# Altium PCB MB784.PCBDOC (part 2 of 4)
Units mil, origin at the board's own origin, x right, y up, seen from the top; angles counter-clockwise.
Board outline 4505 x 6805 mil, 4 copper layers (TopLayer, GND, S1, BottomLayer); 363 components, 323 nets, 1564 pads, 534 vias.
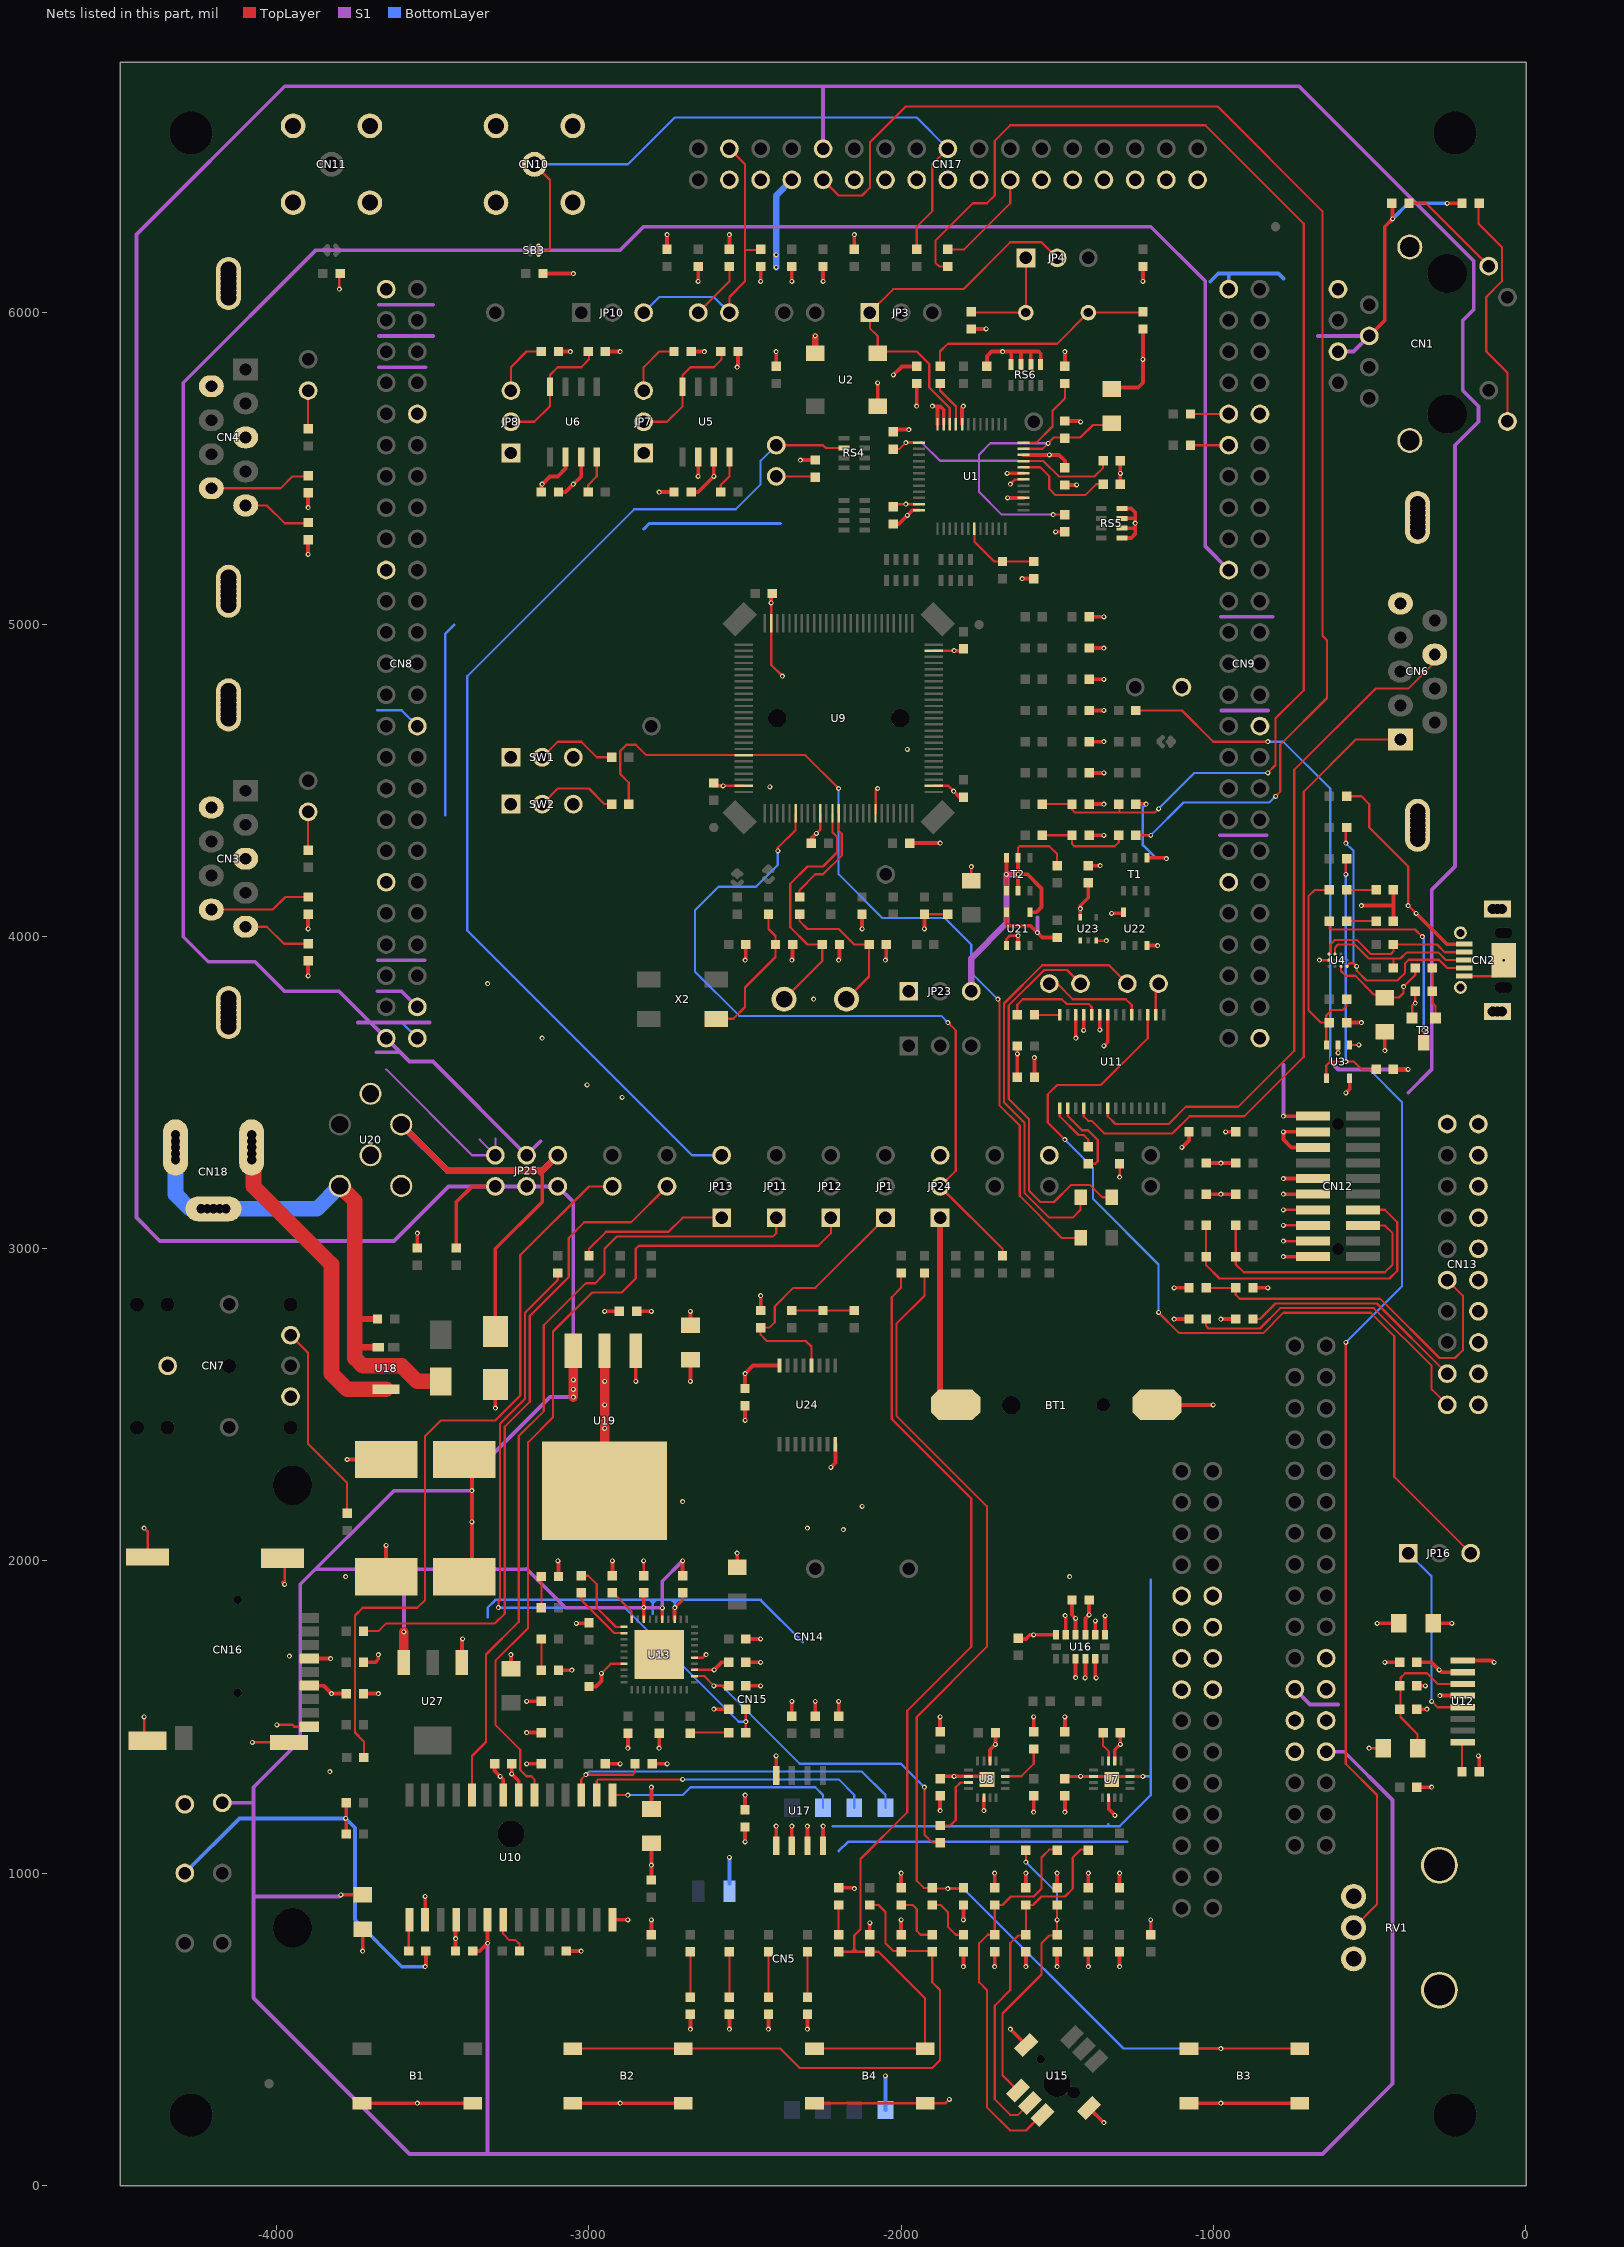
[diagram p4: the nets of this part, all layers, seen from the top]

## Via types
v1: diameter 16, hole 8, TopLayer to BottomLayer, tented both sides, 534 vias

## Nets (pads, with @x,y where several pads share a name; then routed paths per layer and width w, separated by ;. In a path a pad name is that pad's centre, name@x,y a point inside that pad or via, vN(x,y) a via of type N, cw(c..) or ccw(c..) an arc to the next point about the centre after c; other vN are vias at no path point) (continued)
+3V3: B2.1 B2.4 C1.2 C2.2 C6.1 C7.2 C8.2 C13.2 C14.2 C23.1 C26.1 C28.1 C34.2 C35.1 C42.2 C48.1 C75.1 C80.1 C89.1 C90.2 C91.2 C92.2 CN1.4 CN1.5 CN8.48 CN12.1 CN13.1 CN13.2 CN14.24 CN14.25 CN15.9 CN15.10 CN15.13 CN15.14 CN16.4 CN17.28 JP23.1 JP24.3 R1.1 R2.2 R3.1 R6.2 R7.2 R8.2 R13.2 R14.2 R32.1 R33.2 R34.1 R37.2 R39.2 R40.1 R48.2 R50.2 R54.1 R55.1 R56.2 R62.2 R64.1 R65.1 R66.1 R70.1 R71.1 R76.1 R77.1 R89.1 R90.2 R91.2 R92.2 R93.2 R106.1 R107.1 R109.1 R114.2 R115.2 R118.2 R121.2 R122.2 R123.2 R124.2 R133.1 R134.1 R138.2 R146.2 R152.1 R156.2 R160.2 R164.2 RS5.1 RS5.3 RS5.5 RS5.7 RS6.1 RS6.3 RS6.5 RS6.7 RV1.3 SW1.1 SW2.1 T1.4 TP10.1 U1.22 U1.32 U1.48 U2.4 U5.3 U6.3 U7.6 U7.14 U8.6 U8.14 U10.21 U11.22 U11.26 U12.7 U13.33 U16.1 U16.3 U16.6 U17.8 U19.2 U21.5 U22.5 U23.5 U24.16 | length 10982.6
  TopLayer w8: U13.33@-2662.01,1650.79 v1(-2599.21,1650.79)
  TopLayer w12: v1(-3900,4025) R54.1@-3900,4072.5 ; v1(-3900,5375) R55.1@-3900,5422.5 ; CN16.4@-3896.65,1687.01 v1(-3827.99,1687.01) ; v1(-3780,1175) v1@-3777.5,1175 ; R65.1@-3777.5,1125 R64.1@-3777.5,1220 ; C7.2@-3722.5,1575 v1(-3675,1575) ; R138.2@-3722.5,1675 -3685,1675 -3675,1685 v1(-3675,1700) ; v1(-3525,700) -3522.5,702.5 R71.1@-3522.5,750 ; C23.1@-3247.5,1350 v1(-3247.5,1317.5) -3225,1295 U10.21@-3225,1250 ; v1(-3200,1350) R66.1@-3152.5,1350 ; C13.2@-3097.5,5425 -3075,5425 -3025,5475 U6.3@-3025,5537.5 ; R50.2@-3097.5,5875 v1(-3060,5875) ; B2.1@-3052.17,262.5 B2.4@-2697.83,262.5 ; v1(-2950,2800) C80.1@-2902.5,2800 ; R70.1@-2800,977.5 C26.1@-2800,1095 ; C75.1@-2675,2755 v1(-2675,2800) ; C14.2@-2672.5,5425 -2650,5425 v1(-2600,5475) U5.3@-2600,5537.5 ; R48.2@-2672.5,5875 v1(-2630,5875) ; v1(-2599.21,1650.79) -2575,1675 C42.2@-2552.5,1675 ; C91.2@-2500,1202.5 v1(-2500,1250) ; C48.1@-2500,2552.5 v1(-2500,2600) -2474.02,2625.98 U24.16@-2389.57,2625.98 ; R152.1@-2450,2802.5 v1(-2450,2850) ; U17.8@-2400,1312.5 v1(-2400,1375) ; R32.1@-2400,5827.5 v1(-2400,5875) ; R107.1@-2350,1502.5 v1(-2350,1550) ; v1(-2322.5,5527.5) R2.2@-2275,5527.5 ; R134.1@-2275,1502.5 v1(-2275,1550) ; R133.1@-2200,1502.5 v1(-2200,1550) ; R115.2@-2100,802.5 v1(-2100,840) ; C1.2@-2025,5322.5 -2007.5,5322.5 -1963.27,5366.73 U1.48@-1942.32,5366.73 ; R109.1@-2000,952.5 v1(-2000,1000) ; v1(-1950,5700) C8.2@-1950,5772.5 ; v1(-1875,1200) C90.2@-1875,1247.5 ; U1.32@-1804.53,5642.32 -1804.53,5695.47 v1(-1800,5700) ; v1(-1800,850) R114.2@-1800,897.5 ; v1(-1735,1200) -1734.84,1200.16 U8.14@-1734.84,1241.26 ; R8.2@-1725,5827.5 -1725,5860 -1710,5875 -1560,5875 -1552.76,5867.76 RS6.1@-1552.76,5833.5 ; U8.6@-1715.16,1358.74 -1715.16,1394.84 v1(-1697.5,1412.5) R164.2@-1697.5,1450 ; v1(-1700,700) R90.2@-1700,747.5 ; U21.5@-1662.4,4078.15 -1662.4,4042.4 -1655,4035 -1585,4035 -1547.5,3997.5 R156.2@-1500,3997.5 ; RS6.7@-1647.24,5833.5 -1647.24,5872.76 ; R106.1@-1622.5,1750 -1600,1750 -1586.61,1763.39 U16.6@-1503.74,1763.39 ; RS6.5@-1615.75,5833.5 -1615.75,5874.25 ; v1(-1612.5,5147.5) R1.1@-1575,5147.5 ; U1.22@-1607.68,5543.9 -1493.9,5543.9 -1475,5525 C6.1@-1475,5502.5 ; v1(-1600,700) R89.1@-1600,747.5 ; RS6.3@-1584.25,5833.5 -1584.25,5874.25 ; v1(-1575,1195) R160.2@-1575,1247.5 ; R56.2@-1575,1452.5 v1(-1575,1500) ; C28.1@-1572.5,3550 v1(-1572.5,3612.5) ; v1(-1500,700) R91.2@-1500,747.5 ; v1(-1475,1195) C89.1@-1475,1247.5 ; U11.26@-1440.16,3749.61 -1440.16,3675.16 v1(-1440,3675) ; U23.5@-1425.59,4062.4 -1425.59,4099.41 -1400,4125 C2.2@-1400,4175 ; U16.3@-1409.25,1763.39 -1409.25,1815.75 v1(-1397.5,1827.5) C92.2@-1397.5,1875 ; v1(-1400,700) R92.2@-1400,747.5 ; v1(-1350,3650) -1337.8,3662.2 U11.22@-1337.8,3749.61 ; U16.1@-1346.26,1763.39 v1(-1346.26,1823.74) ; U7.14@-1334.84,1241.26 -1334.84,1204.84 v1(-1315,1185) ; v1(-1325,4075) U22.5@-1290.55,4075 ; U7.6@-1315.16,1358.74 -1315.16,1394.84 v1(-1297.5,1412.5) R37.2@-1297.5,1450 ; v1(-1300,700) R93.2@-1300,747.5 ; R7.2@-1297.5,5450 R6.2@-1297.5,5525 ; RS5.1@-1291.5,5277.76 -1262.24,5277.76 -1250,5290 -1250,5360 -1262.24,5372.24 RS5.7@-1291.5,5372.24 ; RS5.3@-1291.5,5309.25 -1250.75,5309.25 ; RS5.5@-1291.5,5340.75 -1250.75,5340.75 ; v1(-1225,6100) R146.2@-1225,6147.5 ; T1.4@-1212.6,4253.15 -1153.15,4253.15 v1(-1150,4250) ; R62.2@-1022.5,3175 R122.2@-927.5,3175 ; R124.2@-1022.5,3275 R123.2@-927.5,3275 ; v1(-960,3375) R121.2@-927.5,3375 ; R118.2@-872.5,2875 v1(-825,2875) ; v1(-775,3425) CN12.1@-680,3425 ; R34.1@-572.5,3725 v1(-525,3725) ; v1(-525,4100) -422.5,4100 ; CN1.5@-500,5925 -450,5975 -450,6275 v1(-425,6300) R13.2@-425,6347.5 ; R40.1@-422.5,3575 v1(-375,3575) ; R39.2@-422.5,4050 R33.2@-422.5,4150 ; R3.1@-347.5,1275 v1(-300,1275) ; R77.1@-347.5,1525 v1(-315,1525) ; C34.2@-347.5,1675 -300,1675 -268.5,1643.5 U12.7@-200,1643.5 ; C35.1@-295,1800 v1(-235,1800) ; v1(-250,6350) R14.2@-202.5,6350 ; v1(-150,1375) -147.5,1372.5 R76.1@-147.5,1325
  TopLayer w20: U2.4@-2275,5870 v1(-2275,5925)
  TopLayer w30: U19.2@-2950,2225 U19.2@-2950,2673.82
  S1 w12: -3677.43,3825 -3600,3825 CN8.48@-3550,3775 ; -3676.1,3925 -3527.09,3925 ; -3672.91,5825 -3523.9,5825 ; -3672.91,5925 -3500,5925 ; -3672.91,6025 -3500,6025 ; v1(-1562.97,4012.97) -1562.97,4062.03 ; -978.39,4325 -829.38,4325 ; -976.1,5025 -810,5025 ; -972.91,4725 -823.9,4725 ; v1(-775,3425) -775,3590 ; -665,5925 CN1.5@-500,5925 -550,5875 CN1.4@-600,5875 ; -620,3595 -600,3575 v1(-375,3575)
  BottomLayer w12: TP10.1@-4295,1000 -4120,1175 v1(-3780,1175) -3750,1145 -3750,850 -3600,700 v1(-3525,700) ; v1(-425,6300) -375,6350 v1(-250,6350)
  BottomLayer w20: v1(-2400,6145) -2400,6375 CN17.28@-2350,6425
  other v1: -2900,262.5 -2800,1025 -275.77,1650.77 -1575,1763.39 -2950,2425 -2950,2500 -2950,2575 -975,3175 -975,3275 -1425.59,4090 -1250,5325 -1980,5350 -3050,5450 -1297.5,5485 -1525,5543.9 -1675,5875 -2400,6185
+5V: C21.1 C25.1 C37.1 C38.1 C79.1 C79_1.1 CN14.23 CN14.28 CN17.25 JP25.1 JP25.3 JP25.5 R148.2 TP11.1 U3.5 U10.6 U13.5 U13.8 U19.3 U27.3 | length 24920.5
  TopLayer w12: v1(-3795,930) C25.1@-3725,930 ; R148.2@-3425,3002.5 -3425,3150 -3375,3200 JP25.1@-3300,3200 ; C79.1@-3375,1950 C79_1.1@-3375,2325 ; C21.1@-3372.5,750 -3350,750 v1(-3325,775) U10.6@-3325,850 ; U13.8@-2824.21,1812.99 C38.1@-2824.21,1896.71 ; U13.5@-2765.16,1812.99 v1(-2765.16,1849.84) ; C37.1@-2700,1952.5 v1(-2700,2000) ; v1(-575,3500) -562.6,3512.4 U3.5@-562.6,3546.85
  TopLayer w30: U27.3@-3593,1675 v1(-3593,1773) ; v1(-3050,2525) U19.3@-3050,2673.82
  S1 w12: TP11.1@-4175,1225 -4075,1225 ; -4075,925 v1@-3800,925 ; -3877,1973 -3202,1973 -3200,1975 -3074.84,1849.84 v1(-2765.16,1849.84) -2765.16,1934.84 v1(-2700,2000) ; v1(-3593,1773) -3593,1973 ; -3375,1975 v1(-3375,2125) ; -3325,100 v1(-3325,775) ; CN17.25@-2250,6525 -2250,6725 ; CN14.23@-738.06,1588.72 -689.35,1540 -600,1540 ; CN14.28@-638.06,1388.72 -580,1388.72 -425,1233.72 -425,325 -650,100 -3575,100 -4075,600 -4075,1275 -3925,1425 -3925,1925 -3625,2225 v1(-3375,2225) -3375,2275 -3125,2525 v1(-3050,2525) -3050,3150 JP25.5@-3100,3200 -3450,3200 -3625,3025 -4375,3025 -4450,3100 -4450,6250 -3975,6725 -725,6725 -165,6165 -165,6010 -200,5975 -200,5750 -150,5700 -150,5650 -225,5575 -225,4225 -300,4150 -300,3575 -375,3500
  other v1: -2824.21,1850.79 -3050,2550 -3050,2580
CTS: CN6.8 U11.7 | length 2247.8
  TopLayer w7: U11.7@-1337.8,3450.39 -1337.8,3425 -1312.8,3400 -1142.43,3400 -1087.43,3455 -920,3455 -740,3635 -740,4535 -480,4795 -375,4795 -290,4880 CN6.8@-290,4904
D5V: CN8.49 CN9.19 JP25.4 | length 8045.9
  S1 w12: -3740,3725 -3510,3725 ; -3681.62,3630 -3605,3630 ; -3155,3345 JP25.4@-3200,3300 -3500,3600 -3575,3600 -3800,3825 -3975,3825 -4070,3920 -4220,3920 -4300,4000 -4300,5775 -3875,6200 -2900,6200 -2825,6275 -1200,6275 -1025,6100 -1025,5250 CN9.19@-950,5175
DCD: CN6.1 U11.4 | length 2083.7
  TopLayer w7: U11.4@-1414.57,3450.39 -1414.57,3424.57 -1400,3410 -1388.79,3410 -1348.79,3370 -1130,3370 -1075,3425 -900,3425 -710,3615 -710,4465 -543,4632 CN6.1@-400,4632
E5V: C74.1 JP25.6 U20.3 | length 1765.9
  TopLayer w12: C74.1@-3300,2735 -3300,3000 -3150,3150 -3150,3250 ; -3165,3250 -3150,3235
  TopLayer w20: U20.3@-3601.57,3398.43 -3453.15,3250 -3150,3250 JP25.6@-3100,3300
  S1 w20: U20.3@-3601.57,3398.43 -3453.15,3250 -3150,3250 JP25.6@-3100,3300
GND: B1.1 B1.4 B3.1 B3.4 B4.1 B4.4 BT1.2 C1.1 C2.1 C3.2 C4.1 C5.1 C6.2 C7.1 C8.1 C9.1 C10.2 C11.2 C12.2 C13.1 C14.1 C15.1 C16.2 C17.2 C18.2 C19.2 C21.2 C22.2 C23.2 C24.1 C25.2 C26.2 C27.2 C28.2 C29.2 C32.2 C33.2 C34.1 C35.2 C36.2 C37.2 C38.2 C39.1 C40.1 C41.1 C42.1 C45.2 C47.2 C48.2 C49.1 C50.1 C51.2 C52.1 C53.1 C54.1 C55.1 C56.1 C60.1 C61.1 C62.1 C63.1 C64.1 C65.1 C66.1 C67.1 C68.1 C69.1 C70.1 C71.1 C72.1 C73.1 C74.2 C75.2 C76.2 C78.2 C79.2 C79_1.2 C80.2 C81.2 C82.2 C83.2 C84.2 C85.2 C86.2 C87.2 C89.2 C90.1 C91.1 C92.1 C93.1 C94.1 CN1.8 CN1.13 CN1.14 CN2.0 CN2.5 CN3.0 CN3.3 CN3.6 CN4.0 CN4.3 CN4.6 CN5.5 CN5.17 CN6.0 CN6.5 CN7.1 CN7.4 CN8.1 CN8.10 CN8.19 CN8.30 CN8.39 CN8.50 CN9.1 CN9.10 CN9.30 CN9.39 CN9.50 CN10.1 CN10.2 CN10.3 CN10.4 CN11.1 CN11.2 CN11.3 CN11.4 CN12.3 CN12.5 CN12.9 CN12.11 CN12.13 CN12.15 CN12.17 CN12.19 CN13.4 CN13.6 CN13.8 CN13.10 CN13.12 CN13.14 CN13.16 CN13.18 CN13.20 CN14.22 CN14.26 CN14.27 CN15.11 CN15.12 CN15.15 CN15.16 CN16.6 CN16.9 CN16.G1 CN16.G2 CN16.G3 CN16.G4 CN17.2 CN17.4 CN17.6 CN17.8 CN17.10 CN17.12 CN17.16 CN17.18 CN17.20 CN17.22 CN17.24 CN17.30 CN17.32 JP7.1 JP8.1 JP17.2 LD1.2 LD2.2 LD3.2 LD4.2 LD7.2 R5.1 R31.1 R46.2 R47.2 R49.1 R51.1 R57.2 R58.2 R67.2 R72.1 R73.1 R74.2 R81.2 R108.1 R110.1 R111.1 R112.2 R113.2 R117.2 R125.1 R126.1 R127.2 R128.2 R145.1 R147.1 RV1.0 RV1.1 SW1.3 SW2.3 T3.1 TP7.1 TP12.1 U1.15 U1.19 U1.35 U1.36 U1.47 U2.2 U3.2 U4.D2 U5.2 U6.2 U7.0 U7.3 U7.10 U8.0 U8.10 U9.10 U9.19 U9.27 U9.49 U9.74 U9.99 U10.2 U10.4 U10.14 U10.22 U11.23 U11.25 U12.5 U12.8 U13.0 U13.3 U13.17 U13.35 U15.G U16.2 U16.4 U16.5 U16.10 U16.11 U16.12 U17.1 U17.2 U17.3 U17.4 U19.1 U20.4 U20.5 U20.6 U21.1 U21.2 U22.3 U23.3 U24.8 U27.1 | length 18206.8
  TopLayer w8: CN16.G2@-4425,1430 v1(-4425,1500) ; v1(-4425,2105) -4414.37,2094.37 CN16.G3@-4414.37,2012.8 ; v1(-4078.31,1418.31) CN16.G4@-3961.61,1418.31 ; v1(-4000,1475) -3950,1475 -3943.5,1468.5 CN16.9@-3896.65,1468.5 ; v1(-3975,1925) CN16.G1@-3975,2015 ; v1(-3800,6075) R113.2@-3800,6122.5 ; v1(-2960,1640) -2929.53,1670.47 U13.17@-2887.99,1670.47 ; C38.2@-2825,1952.5 v1(-2825,2000) ; U13.35@-2662.01,1690.16 -2634.84,1690.16 v1(-2625,1700) ; v1(-2570,4483.46) U9.99@-2504.13,4483.46 ; v1(-2416.54,5070) -2416.54,4871.54 v1(-2380,4835) ; B4.1@-2277.17,262.5 -1857.5,262.5 v1(-1845,275) ; v1(-2271.12,4331.38) -2259.06,4343.44 U9.10@-2259.06,4395.87 ; U9.19@-2081.89,4395.87 -2081.89,4468.11 v1(-2075,4475) ; C1.1@-2023.58,5386.42 U1.47@-1942.32,5386.42 ; C86.2@-1925,4072.5 C27.2@-1850,4072.5 ; U9.27@-1895.87,4483.46 -1848.46,4483.46 v1(-1831.32,4466.32) ; U9.49@-1895.87,4916.54 v1(-1830,4916.54) ; C76.2@-1775,4180 v1(-1775,4225) ; U21.1@-1662.4,3971.85 -1662.4,3992.6 -1651.3,4003.7 v1(-1625,4003.7) ; U23.3@-1374.41,3987.6 v1(-1342.4,3987.6) ; v1(-1300,3230) C33.2@-1300,3272.5 ; v1(-775,3025) CN12.17@-680,3025 ; v1(-775,3075) CN12.15@-680,3075 ; v1(-775,3125) CN12.13@-680,3125 ; v1(-659.5,3925) U4.D2@-629.53,3925 ; v1(-500,1400) C36.2@-455,1400 ; T3.1@-362.5,3740 -362.5,3777.5 v1(-352.5,3787.5) R5.1@-352.5,3825 ; CN2.5@-195,3873.82 CN2.0@-91.18,3873.82
  TopLayer w10: v1@-2725.79,1849.21 -2700,1875 C37.2@-2700,1897.5 ; C89.2@-1479.84,1309.84 v1(-1225.16,1309.84)
  TopLayer w12: -3981.3,1931.3 v1(-3975,1925) ; v1(-3900,3875) R49.1@-3900,3922.5 ; v1(-3900,5225) R51.1@-3900,5272.5 ; CN16.6@-3896.65,1600.39 -3850.39,1600.39 v1(-3825,1575) C7.1@-3777.5,1575 ; v1(-3775,2325) C79_1.2@-3625,2325 ; B1.1@-3727.17,262.5 B1.4@-3372.83,262.5 ; v1(-3725,750) C25.2@-3725,820 ; C79.2@-3650,1925 v1(-3650,2050) ; LD7.2@-3550,3002.5 v1(-3550,3050) ; U10.2@-3525,850 v1(-3525,925) ; C21.2@-3427.5,750 U10.4@-3427.5,847.5 ; U27.1@-3407,1675 -3407,1748 v1(-3405,1750) ; C23.2@-3302.5,1350 -3302.5,1327.5 -3275,1300 U10.22@-3275,1250 ; v1(-3300,2490) C74.2@-3300,2565 ; C51.2@-3250,1655 v1(-3250,1700) ; v1(-3200,1450) C50.1@-3152.5,1450 ; v1(-3200,1550) C49.1@-3152.5,1550 ; C13.1@-3152.5,5425 -3152.5,5447.5 -3125,5475 -3100,5475 -3075,5500 U6.2@-3075,5537.5 ; R112.2@-3147.5,6125 v1(-3050,6125) ; v1(-3100,2000) -3097.5,1997.5 R72.1@-3097.5,1950 ; R73.1@-3097.5,1650 v1(-3055,1650) ; C22.2@-3072.5,750 v1(-3025,750) ; v1(-3040,1800) C39.1@-3002.5,1800 ; C41.1@-3000,1597.5 -2977.5,1597.5 -2960,1615 v1(-2960,1640) ; R67.2@-2947.5,1350 v1(-2900,1350) ; R47.2@-2947.5,5875 v1(-2900,5875) ; U10.14@-2925,850 v1(-2875,850) ; C45.2@-2925,1952.5 v1(-2925,2000) ; v1(-2875,1400) C93.1@-2875,1447.5 ; v1(-2850,2575) U19.1@-2850,2673.82 ; C80.2@-2847.5,2800 v1(-2800,2800) ; C15.1@-2800,802.5 v1(-2800,850) ; C26.2@-2800,1205 v1(-2800,1275) ; C24.1@-2797.5,1350 v1(-2750,1350) ; v1(-2775,1400) C94.1@-2775,1447.5 ; v1(-2775,5425) C14.1@-2727.5,5425 ; C67.1@-2750,6202.5 v1(-2750,6250) ; U13.3@-2725.79,1812.99 v1@-2725.79,1849.21 ; v1(-2675,500) LD4.2@-2675,547.5 ; v1(-2675,2575) C75.2@-2675,2645 ; v1(-2650,5475) U5.2@-2650,5537.5 ; v1(-2650,6100) C70.1@-2650,6147.5 ; C85.2@-2603.46,4483.46 v1(-2570,4483.46) ; v1(-2600,1525) R81.2@-2552.5,1525 ; v1(-2550,500) LD3.2@-2550,547.5 ; C73.1@-2550,6202.5 v1(-2550,6250) ; C47.2@-2525,1980 v1(-2525,2025) ; v1(-2525,5825) -2522.5,5827.5 R46.2@-2522.5,5875 ; v1(-2500,1100) C91.1@-2500,1147.5 ; v1(-2500,2450) C48.2@-2500,2497.5 ; v1(-2500,3925) -2497.5,3927.5 C16.2@-2497.5,3975 ; R74.2@-2497.5,1600 v1(-2450,1600) ; C42.1@-2497.5,1675 v1(-2450,1675) ; C40.1@-2497.5,1750 v1(-2450,1750) ; v1(-2450,6100) C68.1@-2450,6155 ; v1(-2425,500) LD2.2@-2425,547.5 ; v1(-2416.54,5070) C84.2@-2416.54,5094.04 ; U17.1@-2400,1087.5 v1(-2400,1150) ; U17.2@-2350,1087.5 v1(-2350,1150) ; v1(-2350,3925) -2347.5,3927.5 C17.2@-2347.5,3975 ; v1(-2350,6100) C69.1@-2350,6147.5 ; v1(-2300,500) LD1.2@-2300,547.5 ; U17.3@-2300,1087.5 v1(-2300,1150) ; C81.2@-2287.5,4300 -2287.5,4315 v1(-2271.12,4331.38) ; v1@-2269.87,4330.13 v1@-2269.87,4332.63 ; U17.4@-2250,1087.5 v1(-2250,1150) ; v1(-2250,6100) C72.1@-2250,6147.5 ; v1(-2225,2300) -2210.43,2314.57 U24.8@-2210.43,2374.02 ; R111.1@-2200,952.5 -2152.5,952.5 v1(-2150,950) ; v1(-2200,3925) -2197.5,3927.5 C18.2@-2197.5,3975 ; C71.1@-2150,6202.5 v1(-2150,6250) ; v1(-2125,4025) R147.1@-2125,4072.5 ; U2.2@-2075,5700 v1(-2075,5775) ; v1(-2050,3925) -2047.5,3927.5 C19.2@-2047.5,3975 ; C5.1@-2030,5625 v1(-1975,5625) ; v1(-2025,5800) -1997.5,5827.5 C8.1@-1950,5827.5 ; R117.2@-2000,802.5 v1(-2000,850) ; C87.2@-1972.5,4300 v1(-1875,4300) ; v1(-1925,4025) C86.2@-1925,4072.5 ; v1(-1900,5700) -1875,5700 -1863.58,5688.58 U1.35@-1863.58,5642.32 ; U1.36@-1883.27,5642.32 -1883.27,5700 ; R58.2@-1875,1452.5 v1(-1875,1500) ; C90.1@-1874.84,1309.84 -1734.84,1309.84 U8.0@-1734.68,1310 ; v1(-1831.32,4466.32) -1812.5,4447.5 C83.2@-1800,4447.5 ; v1(-1830,4916.54) C82.2@-1805.96,4916.54 ; v1(-1800,700) R110.1@-1800,747.5 ; C10.2@-1775,5947.5 v1(-1727.5,5947.5) ; C53.1@-1700,952.5 v1(-1700,1000) ; v1(-1659.84,5484.84) U1.19@-1607.68,5484.84 ; v1(-1658.9,5406.1) U1.15@-1607.68,5406.1 ; v1(-1650,500) U15.G@-1599,448.99 ; C28.2@-1627.5,3550 C32.2@-1627.5,3650 ; U21.2@-1625,3971.85 v1(-1625,4003.7) ; C52.1@-1600,952.5 v1(-1600,1000) ; v1(-1505,5297.5) C3.2@-1475,5297.5 ; C54.1@-1500,952.5 v1(-1500,1000) ; R57.2@-1475,1452.5 v1(-1475,1500) ; C6.2@-1475,5447.5 v1(-1437.5,5447.5) ; C4.1@-1475,5652.5 -1427.5,5652.5 v1(-1425,5650) ; R31.1@-1475,5827.5 v1(-1475,5875) ; v1(-1474.49,1825) -1472.24,1822.76 U16.5@-1472.24,1763.39 ; C92.1@-1452.5,1875 -1452.5,1827.5 v1(-1440.75,1815.75) U16.4@-1440.75,1763.39 ; v1(-1440.75,1625.75) U16.10@-1440.75,1686.61 ; v1(-1415,3700) -1414.57,3700.43 U11.25@-1414.57,3749.61 ; v1(-1410,1625) -1409.25,1625.75 U16.11@-1409.25,1686.61 ; C55.1@-1400,952.5 v1(-1400,1000) ; C2.1@-1400,4227.5 v1(-1362.5,4227.5) ; C63.1@-1397.5,4325 v1(-1350,4325) ; R145.1@-1397.5,4425 v1(-1350,4425) ; C78.2@-1397.5,4525 v1(-1350,4525) ; C64.1@-1397.5,4625 v1(-1350,4625) ; C60.1@-1397.5,4725 v1(-1350,4725) ; C65.1@-1397.5,4825 v1(-1350,4825) ; C66.1@-1397.5,4925 v1(-1350,4925) ; C61.1@-1397.5,5025 v1(-1350,5025) ; U15.G@-1397.47,247.47 v1(-1350,200) ; U16.12@-1377.76,1686.61 -1377.76,1627.76 v1(-1375,1625) ; U16.2@-1377.76,1763.39 v1(-1377.76,1807.76) ; v1(-1363.39,3701.61) U11.23@-1363.39,3749.61 ; C11.2@-1325,5760 -1240,5760 -1225,5775 C9.1@-1225,5947.5 ; C56.1@-1300,952.5 v1(-1300,1000) ; C62.1@-1247.5,4425 v1(-1215,4425) ; U22.3@-1212.6,3971.85 v1(-1178.15,3971.85) ; R108.1@-1200,802.5 v1(-1200,850) ; BT1.2@-1161.42,2500 v1(-1000,2500) ; v1(-1125,2775) R128.2@-1077.5,2775 ; v1(-1125,2875) R126.1@-1077.5,2875 ; v1(-1100,3325) -1077.5,3347.5 R125.1@-1077.5,3375 ; B3.1@-1077.17,262.5 B3.4@-722.83,262.5 ; v1(-975,2775) R127.2@-927.5,2775 ; v1(-775,2975) CN12.19@-680,2975 ; v1(-775,3175) CN12.11@-680,3175 ; v1(-775,3225) CN12.9@-680,3225 ; CN12.5@-680,3325 -750,3325 -775,3350 v1(-775,3375) CN12.3@-680,3375 ; v1(-600,3628.15) U3.2@-600,3653.15 ; v1(-475,1800) C35.2@-405,1800 ; v1(-450,1675) C34.1@-402.5,1675 ; v1(-450,3635) C12.2@-450,3695 ; C29.2@-347.5,1600 v1(-320,1600) ; v1(-273.7,1568.7) U12.5@-200,1568.7 ; U12.8@-200,1680.91 -105.91,1680.91 v1(-100,1675)
  BottomLayer w8: -3678.39,3725 -3600,3725 CN8.50@-3550,3675 ; -3678.39,4725 -3600,4725 CN8.30@-3550,4675 ; -3461,4390 -3461,4970.16 -3431.16,5000 ; -3325,1820 -3325,1850 -3300,1875 -2450,1875 -2315,1740 ; v1@-3010,3525 v1(-3006,3525) ; -2805,1875 -2795,1865 -2785,1875 ; -2795,1830.62 -2795,1875 ; -2735,1875 -2725,1865 -2715,1875 ; v1(-2725,1850) -2725,1875 ; -2218.33,1150 -1341.48,1150 -1335.48,1156 ; -2200,1070 -2170,1100 -1275,1100 ; -1360,1150 -1300,1150 -1200,1250 -1200,1345 ; v1(-1225.16,1309.84) -1200.16,1309.84 -1200,1310 -1200,1940 ; v1(-1215,4425) -1225,4415 -1225,4293.84 -1185.26,4254.1
  BottomLayer w10: -2825,5306.16 -2807.66,5323.5 -2386.5,5323.5
  BottomLayer w12: CN5.17@-2550,966.54 v1(-2550,1050) ; CN5.5@-2050,240.75 v1(-2050,350) ; -1009.34,6099.65 -983.99,6125 -791.01,6125 -774.8,6108.79 ; CN9.1@-950,6075 -950,6125
  other v1: -3550,262.5 -975,262.5 -3427.5,790 -3285,1310 -1830,1309.84 -1425,1309.84 -3830,1325 -3960,1695 -2775,1700 -3780,1950 -1460,1950 -2185,2100 -2300,2105 -2125,2175 -2700,2190 -2894,3485 -1627.5,3625 -3150,3675 -2280,3800 -3325,3850 -69.02,3925 -2420,4480 -1980,4600 -1985,5386.42 -3150,5450 -1225,5850
NC: U23.1
NetB3_2: B3.2 B3.3 C57.2 R104.1 R114.1 | length 3796.5
  TopLayer w7: R104.1@-1925,2922.5 -1925,2850 -2015,2760 -2015,2465 -1725,2175 -1725,1725 -1950,1500 -1950,975 -1927.5,952.5 C57.2@-1900,952.5 ; C57.2@-1897.5,950 R114.1@-1800,950 ; B3.2@-1077.17,437.5 B3.3@-722.83,437.5
  BottomLayer w7: v1(-1850,950) -1800,950 -1287.5,437.5 v1(-975,437.5)
NetB4_2: B4.2 B4.3 C58.2 R105.1 R115.1 | length 3330.5
  TopLayer w7: B4.2@-2277.17,437.5 B4.3@-1922.83,437.5 -1922.83,597.83 -2072.5,747.5 C58.2@-2200,747.5 ; -2160,747.5 -2150,757.5 -2140,747.5 ; -2150,747.5 -2150,800 -2130,820 -2130,1045 -1980,1195 -1980,1520 -1775,1725 -1775,2200 -2030,2455 -2030,2845 -2000,2875 R105.1@-2000,2922.5
NetBT1_1: BT1.1 JP24.1 | length 590
  TopLayer w20: BT1.1@-1875,2510 JP24.1@-1875,3100
NetC3_1: C3.1 C4.2 C5.2 C11.1 U1.18 U1.23 U1.37 | length 1499.4
  TopLayer w7: C5.2@-2025,5562.5 -2005.77,5562.5 v1(-1985,5583.27) U1.37@-1942.32,5583.27 ; v1(-1650,5450) -1634.84,5465.16 U1.18@-1607.68,5465.16 ; U1.23@-1607.68,5563.58 -1546.42,5563.58 -1510,5600 -1425,5600 -1385,5640 C11.1@-1325,5640 ; v1(-1512.5,5352.5) C3.1@-1475,5352.5
  S1 w7: v1(-1985,5583.27) -1933.27,5583.27 -1875,5525 -1625,5525 ; v1(-1528.91,5581.09) -1713.91,5581.09 -1750,5545 -1750,5425 -1677.5,5352.5 v1(-1512.5,5352.5)
NetC9_2: C9.2 R30.2 X1.2 | length 746.8
  TopLayer w7: R30.2@-1875,5827.5 -1875,5875 -1850,5900 -1500,5900 X1.2@-1400,6000 C9.2@-1227.5,6000
NetC10_1: C10.1 JP4.1 X1.1 | length 347.5
  TopLayer w7: C10.1@-1772.5,6000 X1.1@-1600,6000 JP4.1@-1600,6175
NetC17_1: C17.1 R59.1 X2.4 | length 454.7
  TopLayer w7: X2.4@-2591.73,3737.01 -2537.99,3737.01 -2500,3775 -2500,3837.5 -2402.5,3935 -2402.5,4002.5 -2425,4025 R59.1@-2425,4072.5
NetC18_1: C18.1 U9.12 X3.2 | length 814.4
  TopLayer w7: X3.2@-2375,3800 -2252.5,3922.5 C18.1@-2252.5,3975 -2300,3975 -2355,4030 -2355,4170 -2300,4225 -2250,4225 -2205,4270 -2205,4320 -2219.69,4334.69 U9.12@-2219.69,4395.87
NetC19_1: C19.1 R63.2 X3.1 | length 481.1
  TopLayer w7: R63.2@-2325,4072.5 -2325,4050 -2300,4025 -2200,4025 -2150,3975 C19.1@-2102.5,3975 -2102.5,3872.5 X3.1@-2175,3800
NetC20_1: C20.1 U10.7 | length 133.5
  TopLayer w7: U10.7@-3275,850 -3275,805 -3255,785 -3235,785 -3222.5,772.5 C20.1@-3222.5,750
NetC24_2: C24.2 CN5.1 U10.17 | length 1295.3
  TopLayer w7: U10.17@-3025,1250 -3025,1300 v1(-3010,1315) -2860,1315 -2852.5,1322.5 C24.2@-2852.5,1350
  BottomLayer w7: v1(-3010,1315) -3000,1325 -2125,1325 -2050,1250 CN5.1@-2050,1209.25
NetC30_1: C30.1 U11.24 | length 314
  TopLayer w7: C30.1@-1627.5,3750 -1627.5,3782.5 -1610,3800 -1485,3800 -1470,3785 -1398.98,3785 -1388.98,3775 U11.24@-1388.98,3749.61
NetC30_2: C30.2 U11.28 | length 80.8
  TopLayer w7: C30.2@-1572.11,3749.61 U11.28@-1491.34,3749.61
NetC31_1: C31.1 U11.1 | length 170.3
  TopLayer w7: U11.1@-1491.34,3450.39 -1491.34,3425 -1431.34,3365 -1415,3365 -1400,3350 C31.1@-1400,3327.5
NetC31_2: C31.2 U11.2 | length 254.2
  TopLayer w7: U11.2@-1465.75,3450.39 -1465.75,3425.75 -1420,3380 -1401.21,3380 -1370,3348.79 -1370,3280 -1377.5,3272.5 C31.2@-1400,3272.5
NetC45_1: C45.1 U13.10 | length 108.9
  TopLayer w7: C45.1@-2922.5,1897.5 -2863.58,1838.58 U13.10@-2863.58,1812.99
NetC46_1: C46.1 U13.12 | length 203.5
  TopLayer w7: C46.1@-3025,1897.5 -3025,1875 -2918.9,1768.9 U13.12@-2887.99,1768.9
NetC46_2: C46.2 U13.11 | length 248.8
  TopLayer w7: C46.2@-3025,1952.5 -3002.5,1952.5 -2975,1925 -2975,1850 -2913.58,1788.58 U13.11@-2887.99,1788.58
NetC57_1: C57.1 R110.2 | length 167.2
  TopLayer w7: C57.1@-1900,897.5 -1872.5,897.5 -1850,875 -1850,827.5 -1825,802.5 R110.2@-1800,802.5
NetC58_1: C58.1 R111.2 | length 95
  TopLayer w7: C58.1@-2200,802.5 R111.2@-2200,897.5
NetC59_1: C59.1 R109.2 | length 180.4
  TopLayer w7: R109.2@-2000,897.5 -1962.5,897.5 -1950,885 -1950,815 -1937.5,802.5 C59.1@-1900,802.5
NetC59_2: B2.2 B2.3 C59.2 R116.1 R117.1 | length 1883.8
  TopLayer w7: B2.2@-3047.5,437.5 -2387.5,437.5 -2325,375 -1900,375 -1875,400 -1875,625 -1900,650 C59.2@-1900,747.5 ; R116.1@-2100,897.5 -2072.5,897.5 -2050,875 -2050,775 -2025,750 C59.2@-1902.5,750
NetC62_2: C62.2 R84.1 R140.2 R145.2 | length 4309.2
  TopLayer w7: R140.2@-1850,6147.5 -1877.5,6147.5 -1890,6160 -1890,6230 -1770,6350 -1725,6350 -1700,6375 -1700,6550 -1650,6600 -1025,6600 -710,6285 -710,4790 -800,4700 -800,4550 v1(-825,4525) ; R84.1@-1547.5,4425 R145.2@-1452.5,4425 -1452.5,4407.5 -1443.5,4398.5 -1186.5,4398.5 v1(-1175,4410) ; -1300,4398.5 C62.2@-1300,4422.5
  BottomLayer w7: v1(-1175,4410) -1060,4525 v1(-825,4525)
NetC63_2: C63.2 R85.1 R142.2 | length 303.3
  TopLayer w7: R85.1@-1547.5,4325 C63.2@-1452.5,4325 -1452.5,4297.5 -1445,4290 -1315,4290 -1302.5,4302.5 R142.2@-1302.5,4325
NetC73_2: C73.2 JP21.2 | length 188.9
  TopLayer w7: JP21.2@-2650,6000 -2550,6100 C73.2@-2550,6147.5
NetC88_2: C88.2 R153.2 R158.2 | length 200
  TopLayer w7: R153.2@-2350,2802.5 C88.2@-2150,2802.5
NetC95_2: C95.2 R81.1 R83.1 | length 2169.9
  TopLayer w7: v1(-3290,1850) -3290,1870 -3285,1875 -3285,2440 -3205,2520 -3205,2795 -3100,2900 R83.1@-3100,2922.5 ; C95.2@-2497.5,1450 R81.1@-2497.5,1525
  BottomLayer w7: v1(-3290,1850) -2885,1850 -2520,1485 v1(-2497.5,1485)
NetCN5_2: CN5.2 U10.16 | length 933.5
  TopLayer w7: U10.16@-2975,1250 -2975,1295 -2970,1300 v1(-2700,1300)
  BottomLayer w7: v1(-2700,1300) -2200,1300 -2150,1250 CN5.2@-2150,1209.25
NetCN5_3: CN5.3 U10.15 | length 736.5
  TopLayer w7: U10.15@-2925,1250 v1(-2875,1250)
  BottomLayer w7: v1(-2875,1250) -2700,1250 -2675,1275 -2275,1275 -2250,1250 CN5.3@-2250,1209.25
NetCN10_5: CN10.5 CN17.17 R143.2 SB3.1 | length 2120.6
  TopLayer w7: CN10.5@-3175,6475 -3125,6425 -3125,6205 -3131,6199 -3150,6199 SB3.1@-3157,6192 ; R143.2@-1950,6202.5 -1950,6275 -1900,6325 -1900,6475 CN17.17@-1850,6525
  BottomLayer w7: CN10.5@-3175,6475 -2875,6475 -2725,6625 -1950,6625 CN17.17@-1850,6525
NetCN12_14: CN12.14 R119.1 R129.1 | length 1049.5
  TopLayer w7: R119.1@-1022.5,3075 -1022.5,2947.5 -980,2905 -435,2905 -410,2930 -410,3085 -450,3125 CN12.14@-520,3125
NetCN12_16: CN12.16 R120.1 R130.1 | length 853.6
  TopLayer w7: R120.1@-927.5,3075 -927.5,2950 -902.5,2925 -450,2925 -425,2950 -425,3050 -450,3075 CN12.16@-520,3075
NetCN13_11: CN13.11 R118.1 R126.2 | length 1184.9
  TopLayer w7: R126.2@-1022.5,2875 R118.1@-927.5,2875 -927.5,2852.5 -915,2840 -465,2840 -275,2650 -225,2650 -200,2675 -200,2850 CN13.11@-250,2900
NetCN13_17: CN13.17 R127.1 | length 736.4
  TopLayer w7: R127.1@-872.5,2775 -850,2775 -800,2825 -475,2825 CN13.17@-250,2600
NetCN13_19: CN13.19 R128.1 | length 997.4
  TopLayer w7: R128.1@-1022.5,2775 -1022.5,2752.5 -1015,2745 -850,2745 -785,2810 -485,2810 -300,2625 -300,2550 CN13.19@-250,2500
NetCN17_14: CN17.14 R140.1 | length 336.1
  TopLayer w7: R140.1@-1850,6202.5 -1797.5,6202.5 -1650,6350 CN17.14@-1650,6425
NetCN17_26: CN17.26 R142.1 | length 4411.3
  TopLayer w7: CN17.26@-2250,6425 -2200,6375 -2125,6375 -2100,6400 -2100,6545 -1985,6660 -985,6660 -650,6325 -650,4965 -635,4950 -635,4765 -785,4615 -785,4465 v1(-800,4450) ; R142.1@-1247.5,4325 v1(-1200,4325)
  BottomLayer w7: v1(-1200,4325) -1095,4430 -820,4430 v1(-800,4450)
NetCN18_1: CN18.1 U18.1 | length 1058.4
  TopLayer w50: CN18.1@-4075,3359.09 -4075,3200 -3825,2950 -3825,2600 -3775,2550 U18.1@-3650,2550
NetCN18_3: C77.2 CN18.2 CN18.3 U18.2 U20.2 Z1.1 | length 1786.5
  TopLayer w20: -3750,2775 C77.2@-3677.5,2775 ; -3745,2685 U18.2@-3675,2685
  TopLayer w50: U20.2@-3798.43,3201.57 -3750,3153.15 -3750,2650 -3725,2625 -3600,2625 -3550.2,2575.2 Z1.1@-3475,2575.2
  BottomLayer w50: CN18.3@-4325,3365 -4325,3175 -4278.15,3128.15 -3871.85,3128.15 U20.2@-3798.43,3201.57
NetD1_2: D1.2 JP18.1 | length 1366.6
  TopLayer w7: D1.2@-1425,3165 -1425,3125 -1450,3100 -1525,3100 -1605,3180 -1605,3405 -1670,3470 -1670,3786.36 -1547.86,3908.5 -1333.5,3908.5 JP18.1@-1275,3850
NetD2_2: D2.2 JP19.1 | length 1235.1
  TopLayer w7: JP19.1@-1425,3850 -1468.5,3893.5 -1541.5,3893.5 -1655,3780 -1655,3480 -1590,3415 -1590,3186.21 -1553.79,3150 -1510,3150 -1455,3205 -1395,3205 -1355,3165 D2.2@-1325,3165
NetJP1_1: JP1.1 R152.2 U24.12 | length 837.5
  TopLayer w7: U24.12@-2287.2,2625.98 -2287.2,2687.2 -2305,2705 -2430,2705 -2450,2725 R152.2@-2450,2747.5 -2422.5,2747.5 -2405,2765 -2405,2815 -2345,2875 -2275,2875 JP1.1@-2050,3100
NetJP2_1: JP2.1 JP13.3 RS4.6 | length 3489
  TopLayer w7: JP2.1@-2400,5575 -2250,5575 -2240.75,5565.75 RS4.6@-2183.5,5565.75
  BottomLayer w7: JP13.3@-2575,3300 -2670,3300 -3390,4020 -3390,4835 -2855,5370 -2530,5370 -2450,5450 -2450,5525 JP2.1@-2400,5575
NetJP2_2: JP2.2 R2.1 | length 122.5
  TopLayer w7: JP2.2@-2400,5475 R2.1@-2277.5,5475
NetJP3_1: JP3.1 JP4.2 U1.34 U2.3 | length 1255.9
  TopLayer w7: U2.3@-2075,5870 -2075,5925 -2100,5950 JP3.1@-2100,6000 -2025,6075 -1800,6075 -1650,6225 -1550,6225 JP4.2@-1500,6175 ; U2.3@-2075,5875 -1950,5875 -1910,5835 -1910,5760 -1843.9,5693.9 U1.34@-1843.9,5642.32
NetJP7_3: JP7.3 R48.1 | length 193.2
  TopLayer w7: JP7.3@-2825,5750 -2825,5825 -2775,5875 R48.1@-2727.5,5875
NetJP8_3: JP8.3 R50.1 | length 193.2
  TopLayer w7: JP8.3@-3250,5750 -3250,5825 -3200,5875 R50.1@-3152.5,5875
NetJP10_3: C68.2 CN17.31 JP10.3 JP21.1 | length 930.3
  TopLayer w7: JP21.1@-2550,6000 -2550,6050 -2500,6100 -2500,6475 CN17.31@-2550,6525 ; -2500,6200 C68.2@-2452.5,6200
  BottomLayer w7: JP10.3@-2825,6000 -2775,6050 -2600,6050 JP21.1@-2550,6000
NetJP11_1: JP11.1 U10.24 | length 2564.3
  TopLayer w7: U10.24@-3375,1250 -3375,1375 -3330,1420 -3330,1700 -3225,1805 -3225,2400 -3145,2480 -3145,2755 -3010,2890 -2980,2890 -2950,2920 -2950,3000 -2910,3040 -2410,3040 -2400,3050 JP11.1@-2400,3100
NetJP12_1: JP12.1 U10.20 | length 2748.3
  TopLayer w7: U10.20@-3175,1250 -3175,1300 -3185,1310 -3200,1310 -3220,1330 -3220,1395 -3300,1475 -3300,1680 -3195,1785 -3195,2380 -3115,2460 -3115,2735 -2990,2860 -2895,2860 -2850,2905 -2850,3000 -2840,3010 -2265,3010 -2225,3050 JP12.1@-2225,3100
NetJP13_1: JP13.1 R68.2 | length 498.9
  TopLayer w7: R68.2@-3000,2977.5 -3000,3000 -2945,3055 -2745,3055 -2700,3100 JP13.1@-2565,3100
NetJP15_2: JP15.2 R136.2 | length 2147.8
  TopLayer w7: R136.2@-3722.5,1775 -3675,1775 -3650,1800 -3301.21,1800 -3270,1831.21 -3270,2430 -3190,2510 -3190,2785 -3065,2910 -3065,3035 -3015,3085 -2865,3085 JP15.2@-2750,3200
NetJP16_1: JP16.1 U12.4 | length 613.8
  TopLayer w7: v1(-300,1550) -281.3,1531.3 U12.4@-200,1531.3
  BottomLayer w7: JP16.1@-375,2025 -300,1950 v1(-300,1550)
NetJP16_3: JP16.3 U11.17 | length 2957.1
  TopLayer w7: v1(-1475,3350) -1530,3405 -1530,3495 -1500,3525 -1359.84,3525 -1209.84,3675 U11.17@-1209.84,3749.61 ; v1(-1175,2796.21) -1108.79,2730 -840,2730 -775,2795 -495,2795 -420,2720 -420,2270 JP16.3@-175,2025
  BottomLayer w7: v1(-1475,3350) -1385,3260 -1385,3160 -1175,2950 v1(-1175,2796.21) ; JP16.3@-175,2025 JP16.3@-175,2030
NetJP18_2: JP18.2 U11.16 | length 104.2
  TopLayer w7: U11.16@-1184.25,3749.61 -1184.25,3840.75 JP18.2@-1175,3850
NetJP19_2: JP19.2 U11.19 | length 324
  TopLayer w7: JP19.2@-1525,3850 -1500,3850 -1450,3800 -1280,3800 -1261.02,3781.02 U11.19@-1261.02,3749.61
NetJP23_3: JP23.3 R157.1 T2.1 T2.2 T2.5 T2.6 U21.4 | length 1114
  TopLayer w7: T2.5@-1625,4253.15 -1625,4285 -1620,4290 -1525,4290 -1500,4265 R157.1@-1500,4227.5
  TopLayer w12: T2.1@-1662.4,4146.85 T2.6@-1662.4,4253.15 ; v1(-1662.4,4200) -1595,4200 -1550,4155 -1550,4095 -1566.85,4078.15 U21.4@-1587.6,4078.15 ; T2.2@-1625,4146.85 T2.5@-1625,4253.15
  S1 w20: JP23.3@-1775,3825 -1775,3930 -1662.4,4042.6 v1(-1662.4,4200) v1(-1625,4200)
NetJP24_2: JP24.2 R150.2 U9.6 | length 2450.7
  TopLayer w7: v1(-2395,4275) -2395,4285 -2337.8,4342.2 U9.6@-2337.8,4395.87 ; v1(-1850,3725) -1825,3700 -1825,3250 JP24.2@-1875,3200 -1675,3000 R150.2@-1675,2977.5
  BottomLayer w7: v1(-2395,4275) -2395,4230 -2465,4160 -2585,4160 -2660,4085 -2660,3887.76 -2518.74,3746.5 -1871.5,3746.5 v1(-1850,3725)
NetJP26_1: JP26.1 R137.1 | length 2432.6
  TopLayer w7: R137.1@-3721.34,1370 -3721.34,1421.34 -3750,1450 -3750,1825 -3725,1850 -3550,1850 -3525,1875 -3525,2400 -3475,2450 -3300,2450 -3220,2530 -3220,2980 -3000,3200 JP26.1@-2925,3200
NetLD1_1: LD1.1 R94.1 | length 145
  TopLayer w7: LD1.1@-2300,602.5 R94.1@-2300,747.5
NetLD2_1: LD2.1 R95.1 | length 145
  TopLayer w7: LD2.1@-2425,602.5 R95.1@-2425,747.5
NetLD3_1: LD3.1 R96.1 | length 145
  TopLayer w7: LD3.1@-2550,602.5 R96.1@-2550,747.5
NetLD4_1: LD4.1 R97.1 | length 145
  TopLayer w7: LD4.1@-2675,602.5 R97.1@-2675,747.5
NetLD5_1: LD5.1 R33.1 | length 95
  TopLayer w7: LD5.1@-572.5,4150 R33.1@-477.5,4150
NetLD6_2: LD6.2 T3.3 | length 673
  TopLayer w7: LD6.2@-627.5,4050 -627.5,4027.5 -623.11,4023.11 -353.11,4023.11 v1(-330,4000) ; T3.3@-325,3660.5 v1(-325,3700)
  BottomLayer w7: v1(-330,4000) -325,3995 v1(-325,3700)
NetR1_2: R1.2 R41.2 U1.7 | length 257.9
  TopLayer w7: U1.7@-1765.16,5307.68 -1765.16,5266.37 -1701.29,5202.5 R1.2@-1575,5202.5
NetR4_1: R4.1 R5.2 T3.2 | length 164.1
  TopLayer w7: R4.1@-297.5,3900 -297.5,3787.5 -287.5,3777.5 T3.2@-287.5,3740
NetR6_1: R6.1 U1.21 | length 309.5
  TopLayer w7: U1.21@-1607.68,5524.21 -1544.21,5524.21 -1495,5475 -1380,5475 -1352.5,5502.5 R6.1@-1352.5,5525
NetR7_1: R7.1 U1.20 | length 330.2
  TopLayer w7: U1.20@-1607.68,5504.53 -1554.53,5504.53 -1525,5475 -1525,5435 -1505,5415 -1410,5415 -1375,5450 R7.1@-1352.5,5450
NetR13_1: CN1.12 R13.1 | length 338.8
  TopLayer w7: R13.1@-372.5,6350 -318,6350 CN1.12@-117,6149
NetR14_1: CN1.9 R14.1 | length 776.4
  TopLayer w7: R14.1@-150,6347.5 -150,6285 -75,6210 -75,6100 -125,6050 -125,5875 -57,5807 CN1.9@-57,5651
NetR30_1: R30.1 U1.33 | length 151.2
  TopLayer w7: R30.1@-1875,5772.5 -1875,5750 -1824.21,5699.21 U1.33@-1824.21,5642.32
NetR31_2: R31.2 U1.24 | length 268.2
  TopLayer w7: U1.24@-1607.68,5583.27 -1566.73,5583.27 -1515,5635 -1515,5685 -1475,5725 R31.2@-1475,5772.5
NetR34_2: LD5.2 R34.2 R35.2 U3.3 | length 719.1
  TopLayer w7: U3.3@-637.4,3653.15 -637.4,3747.6 -620,3765 -585,3765 -572.5,3777.5 R35.2@-572.5,3800 ; R34.2@-627.5,3725 -655,3725 -695,3765 -695,4130 -675,4150 LD5.2@-627.5,4150
NetR36_1: R36.1 R40.2 U3.4 | length 867.2
  TopLayer w7: U3.4@-637.4,3546.85 -637.4,3587.6 -625,3600 -550,3600 -525,3575 R40.2@-477.5,3575 ; v1(-575,4200) -575,4247.5 R36.1@-572.5,4250
  BottomLayer w7: v1(-575,3600) v1(-575,4200)
NetR37_1: R37.1 U7.7 | length 98.6
  TopLayer w7: R37.1@-1352.5,1450 -1352.5,1407.5 -1334.84,1389.84 U7.7@-1334.84,1358.74
NetR38_1: CN2.4 R38.1 U4.A3 | length 922.7
  TopLayer w7: v1(-575,4300) R38.1@-575,4347.5 ; U4.A3@-570.47,3907.63 -563.1,3915 -550,3915 v1(-540,3905) -540,3891.21 -508.79,3860 -410,3860 -385,3885 -385,3915 -373.5,3926.5 -276.5,3926.5 -249.41,3899.41 CN2.4@-195,3899.41
  BottomLayer w7: v1(-575,4300) -550,4275 -550,3915 v1(-540,3905)
NetR39_1: LD6.1 R39.1 | length 95
  TopLayer w7: LD6.1@-572.5,4050 R39.1@-477.5,4050
NetR42_1: CN2.2 R42.1 U4.D1 | length 522.6
  TopLayer w7: U4.D1@-629.53,3944.68 -624.84,3949.37 -624.84,3974.84 -609.68,3990 -540,3990 -495,3945 -430,3945 -422.5,3952.5 R42.1@-422.5,3975 -282.57,3975 -258.16,3950.59 CN2.2@-195,3950.59
NetR43_1: CN2.3 R43.1 U4.C1 | length 506.7
  TopLayer w7: U4.C1@-609.84,3944.68 -609.84,3965.16 -600,3975 -546.21,3975 -501.21,3930 -400,3930 -380,3950 -278.79,3950 -253.79,3925 CN2.3@-195,3925 ; R43.1@-422.5,3900 -422.5,3930
NetR44_1: R44.1 U5.4 | length 123.9
  TopLayer w7: R44.1@-2577.5,5425 -2577.5,5447.5 -2550,5475 U5.4@-2550,5537.5
NetR45_1: R45.1 U6.4 | length 123.9
  TopLayer w7: R45.1@-3002.5,5425 -3002.5,5447.5 -2975,5475 U6.4@-2975,5537.5
NetR46_1: JP7.2 R46.1 U5.8 | length 413.9
  TopLayer w7: JP7.2@-2825,5650 -2750,5650 -2700,5700 -2700,5800 -2675,5825 -2600,5825 -2575,5850 R46.1@-2575,5872.5
NetR47_1: JP8.2 R47.1 U6.8 | length 413.9
  TopLayer w7: JP8.2@-3250,5650 -3175,5650 -3125,5700 -3125,5800 -3100,5825 -3025,5825 -3000,5850 R47.1@-3000,5872.5
NetR49_2: CN3.5 R49.2 | length 222.6
  TopLayer w7: CN3.5@-4100,4032 -4032,4032 -3977.5,3977.5 R49.2@-3900,3977.5
NetR51_2: CN4.5 R51.2 | length 221.1
  TopLayer w7: CN4.5@-4100,5382 -4032,5382 -3975,5325 R51.2@-3902.5,5325
NetR52_2: JP5.1 R52.2 | length 122.5
  TopLayer w7: R52.2@-3900,4277.5 JP5.1@-3900,4400
NetR53_2: JP6.1 R53.2 | length 122.5
  TopLayer w7: R53.2@-3900,5627.5 JP6.1@-3900,5750
NetR54_2: CN3.9 R54.2 | length 326.8
  TopLayer w7: CN3.9@-4210,4087 -4013,4087 -3972.5,4127.5 R54.2@-3900,4127.5
NetR55_2: CN4.9 R55.2 | length 323.2
  TopLayer w7: CN4.9@-4210,5437 -3988,5437 -3950,5475 R55.2@-3902.5,5475
NetR56_1: R56.1 U8.3 | length 155.4
  TopLayer w7: U8.3@-1666.26,1309.84 -1615.16,1309.84 -1575,1350 R56.1@-1575,1397.5
NetR60_2: R60.2 SW1.2 | length 263.9
  TopLayer w7: SW1.2@-3150,4575 -3100,4625 -3025,4625 -2975,4575 R60.2@-2927.5,4575
NetR61_1: D1.1 R61.1 U9.94 | length 2861
  TopLayer w7: R61.1@-2872.5,4425 -2872.5,4493.71 -2900,4521.21 -2900,4595 -2880,4615 -2850,4615 -2816.89,4581.89 -2306.89,4581.89 v1(-2200,4475) ; v1(-1690,3800) -1685,3795 -1685,3460 -1620,3395 -1620,3170 -1485,3035 D1.1@-1425,3035
  BottomLayer w7: v1(-2200,4475) -2200,4200 -2060,4060 -1860,4060 -1775,3975 -1775,3885 v1(-1690,3800)
NetR61_2: R61.2 SW2.2 | length 263.9
  TopLayer w7: SW2.2@-3150,4425 -3100,4475 -3000,4475 -2950,4425 R61.2@-2927.5,4425
NetR63_1: R63.1 U9.13 | length 343.1
  TopLayer w7: R63.1@-2325,4127.5 -2325,4150 -2275,4200 -2250,4200 -2190,4260 -2190,4330 -2200,4340 U9.13@-2200,4395.87
NetR71_2: R71.2 U10.1 | length 97.5
  TopLayer w7: R71.2@-3577.5,750 U10.1@-3577.5,847.5
NetR72_2: C43.1 R72.2 | length 100
  TopLayer w7: C43.1@-3152.5,1850 R72.2@-3152.5,1950
NetR73_2: C44.1 R73.2 | length 100
  TopLayer w7: R73.2@-3152.5,1650 C44.1@-3152.5,1750
NetR74_1: R74.1 R82.1 U13.32 | length 1144.9
  TopLayer w7: U13.32@-2662.01,1631.1 -2631.1,1631.1 v1(-2600,1600) R74.1@-2552.5,1600 ; v1(-1925,1275) -1925,1122.5 -1900,1097.5 R82.1@-1875,1097.5
  BottomLayer w7: v1(-2600,1600) -2575,1600 -2325,1350 -2000,1350 v1(-1925,1275)
NetR75_2: CN7.6 R75.2 | length 651.6
  TopLayer w7: CN7.6@-3958.94,2726.06 CN7.6@-3955,2730 ; CN7.6@-3956.3,2723.43 -3900,2667.13 -3900,2375 -3775,2250 R75.2@-3775,2152.5
NetR76_2: R76.2 U12.1 | length 91.6
  TopLayer w7: R76.2@-202.5,1325 U12.1@-202.5,1416.59
NetR77_2: C29.1 C36.1 R77.2 U12.6 | length 468
  TopLayer w7: C36.1@-345,1400 -345,1445 -400,1500 -400,1625 -385,1640 -315,1640 -281.1,1606.1 U12.6@-200,1606.1
NetR78_1: C12.1 CN2.1 JP25.2 R4.2 R78.1 U3.1 U4.B3 | length 1657.1
  TopLayer w7: U4.B3@-590.16,3905.31 -590.16,3890.16 -575,3875 -545,3875 -485,3815 C12.1@-440,3815 ; R78.1@-572.5,4450 -525,4450 -500,4425 -500,4350 -375,4225 v1(-375,4100) v1(-350,4075) ; U3.1@-562.6,3653.15 v1(-533.15,3653.15) ; C12.1@-440.16,3805.16 -404.84,3805.16 -390,3820 v1(-390,3840) -352.5,3877.5 R4.2@-352.5,3900
  TopLayer w12: v1(-350,4075) -251.18,3976.18 CN2.1@-195,3976.18
  S1 w7: -3650,3575 -3375,3300 JP25.2@-3300,3300 ; -3350,3350 JP25.2@-3300,3300 ; -3300,3353.86 JP25.2@-3300,3300
NetR80_1: C95.1 R80.1 | length 120
  TopLayer w7: R80.1@-2672.5,1450 C95.1@-2552.5,1450
NetR82_2: R82.2 U8.11 | length 209.8
  TopLayer w7: R82.2@-1875,1152.5 -1842.5,1152.5 -1825,1170 -1825,1275 -1809.84,1290.16 U8.11@-1783.74,1290.16
NetR86_2: R86.2 RV1.2 | length 4674
  TopLayer w7: R86.2@-1247.5,4725 -1100,4725 -1000,4625 v1(-825,4625) ; v1(-575,2700) -575,1350 -475,1250 -475,900 RV1.2@-550,825
  BottomLayer w7: v1(-825,4625) -775,4625 -625,4475 -625,3605 -595,3575 -500,3575 -395,3470 -395,2880 v1(-575,2700)
NetR87_2: CN9.9 R87.2 | length 122.5
  TopLayer w7: R87.2@-1072.5,5675 CN9.9@-950,5675
NetR88_1: CN9.11 R88.1 | length 122.5
  TopLayer w7: R88.1@-1072.5,5575 CN9.11@-950,5575
NetR98_1: C52.2 R89.2 R98.1 U15.2 | length 1157.1
  TopLayer w7: U15.2@-1586.3,263.7 -1625,225 -1650,225 -1700,275 -1700,575 -1650,625 -1650,775 -1625,800 -1602.5,800 R89.2@-1600,802.5 C52.2@-1600,897.5 -1577.5,897.5 -1550,925 -1475,925 -1450,950 -1450,1050 -1425,1075 R98.1@-1402.5,1075
NetR99_1: C53.2 R90.1 R99.1 U15.3 | length 1262.4
  TopLayer w7: U15.3@-1547.33,224.73 -1547.33,227.67 -1600,175 -1650,175 -1725,250 -1725,625 -1750,650 -1750,775 -1722.5,802.5 R90.1@-1700,802.5 C53.2@-1700,897.5 -1675,897.5 -1647.5,925 -1575,925 -1550,950 -1550,1050 -1525,1075 R99.1@-1495,1075
NetR100_1: C54.2 R91.1 R100.1 U15.1 | length 965
  TopLayer w7: U15.1@-1625.27,302.67 -1675,352.4 -1675,550 -1550,675 -1550,775 -1525,800 -1502.5,800 R91.1@-1500,802.5 C54.2@-1500,897.5 ; v1(-1600,1035) R100.1@-1600,1072.5
  BottomLayer w7: v1(-1600,1035) -1500,935 v1(-1500,850)